# Altium PCB PCB_LiPoBATTERY.PcbDoc
Units mil, origin at the board's own origin, x right, y up, seen from the top; angles counter-clockwise.
Board outline 2000 x 2000 mil, 2 copper layers (Top Layer, Bottom Layer); 22 components, 10 nets, 59 pads, 0 vias.
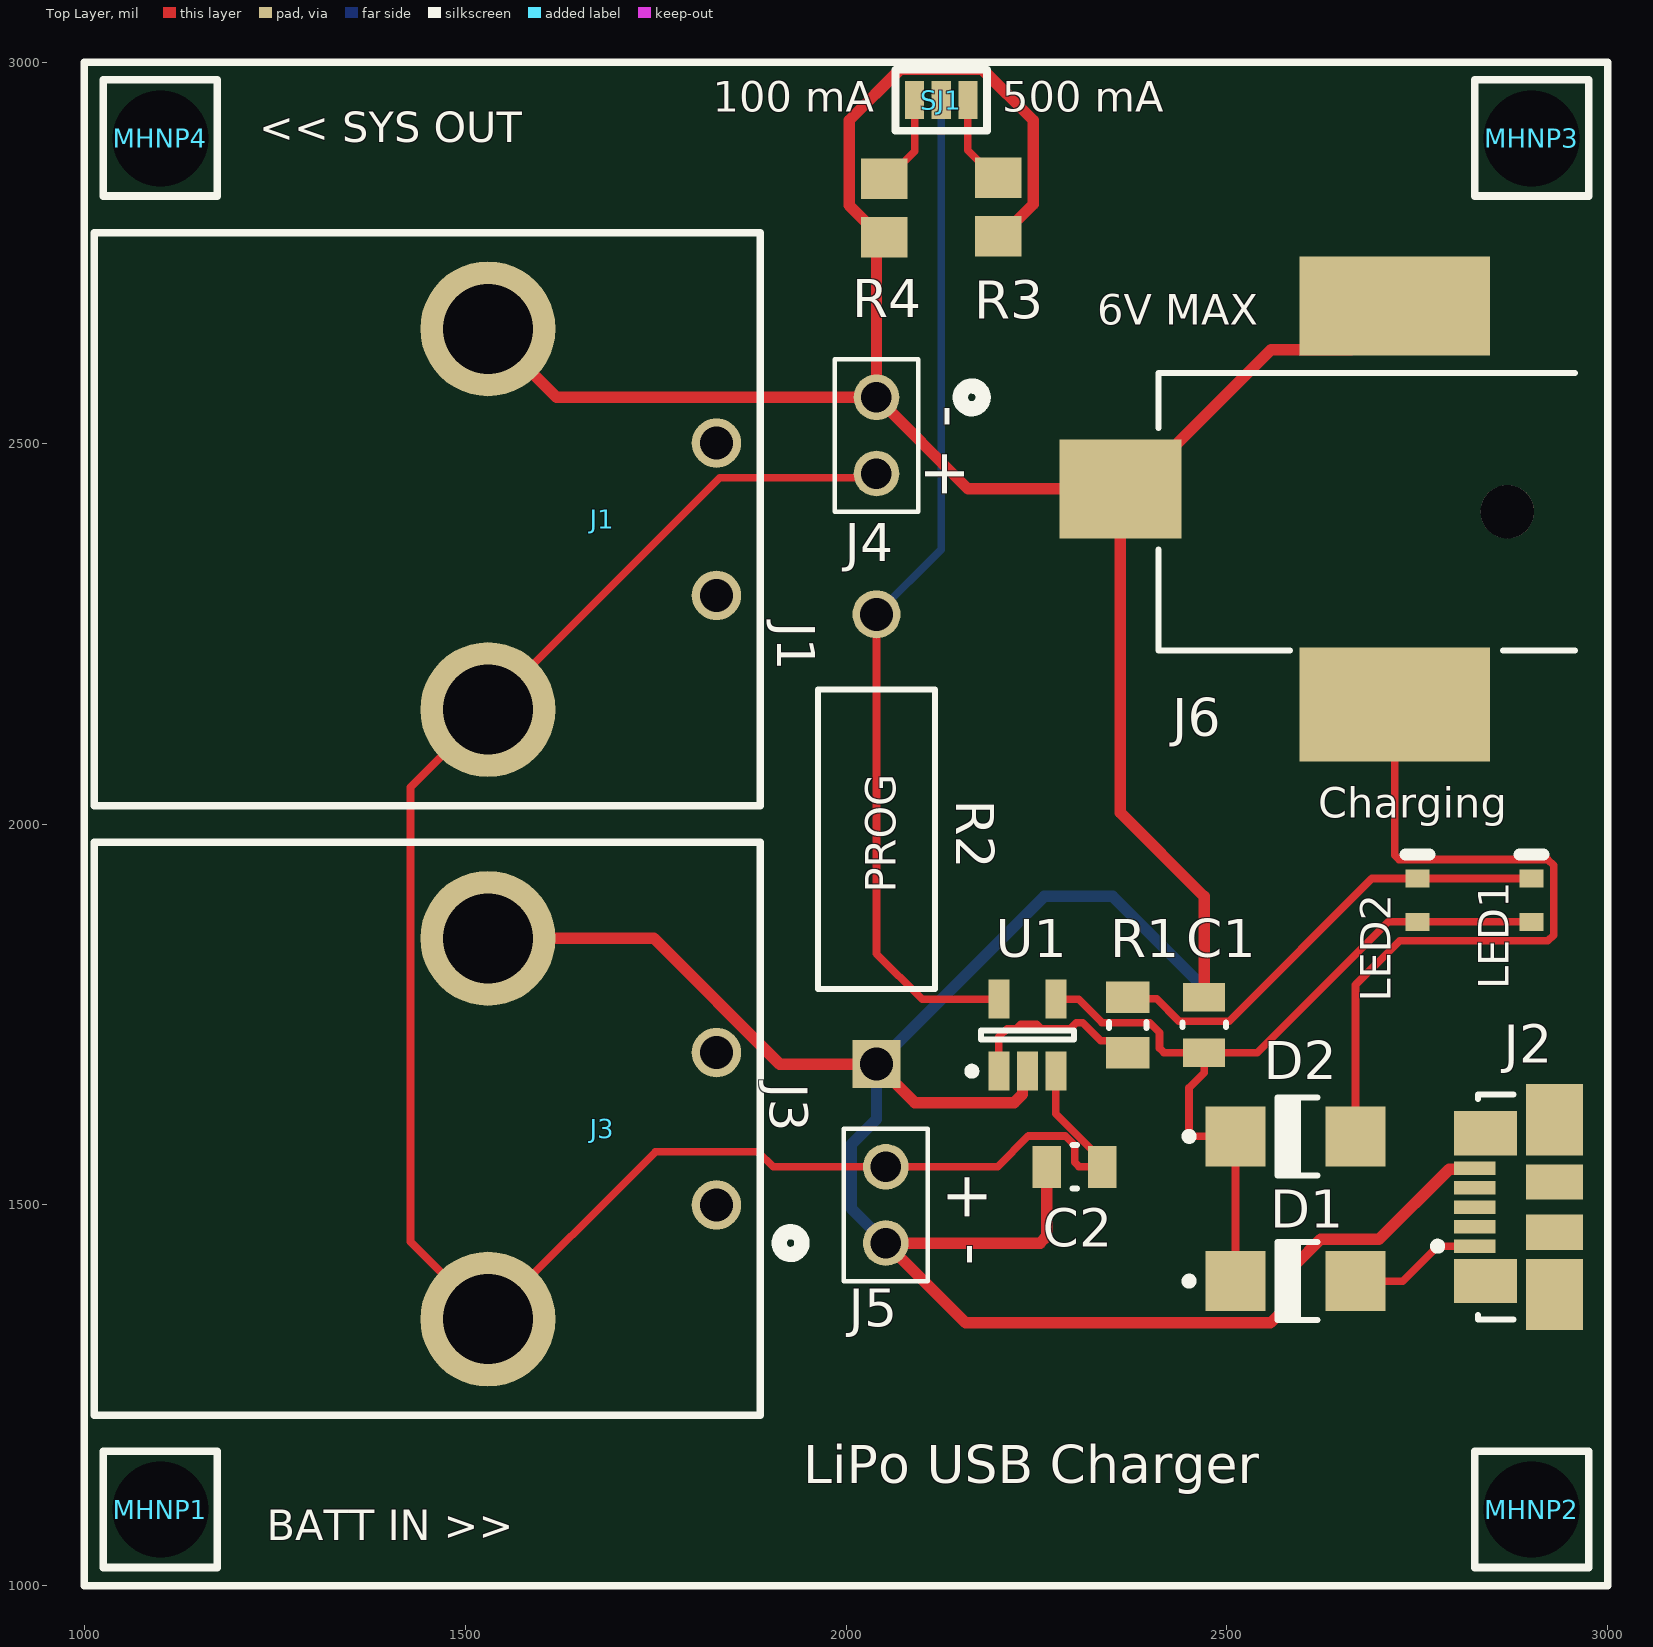
[diagram p0: Top Layer view]
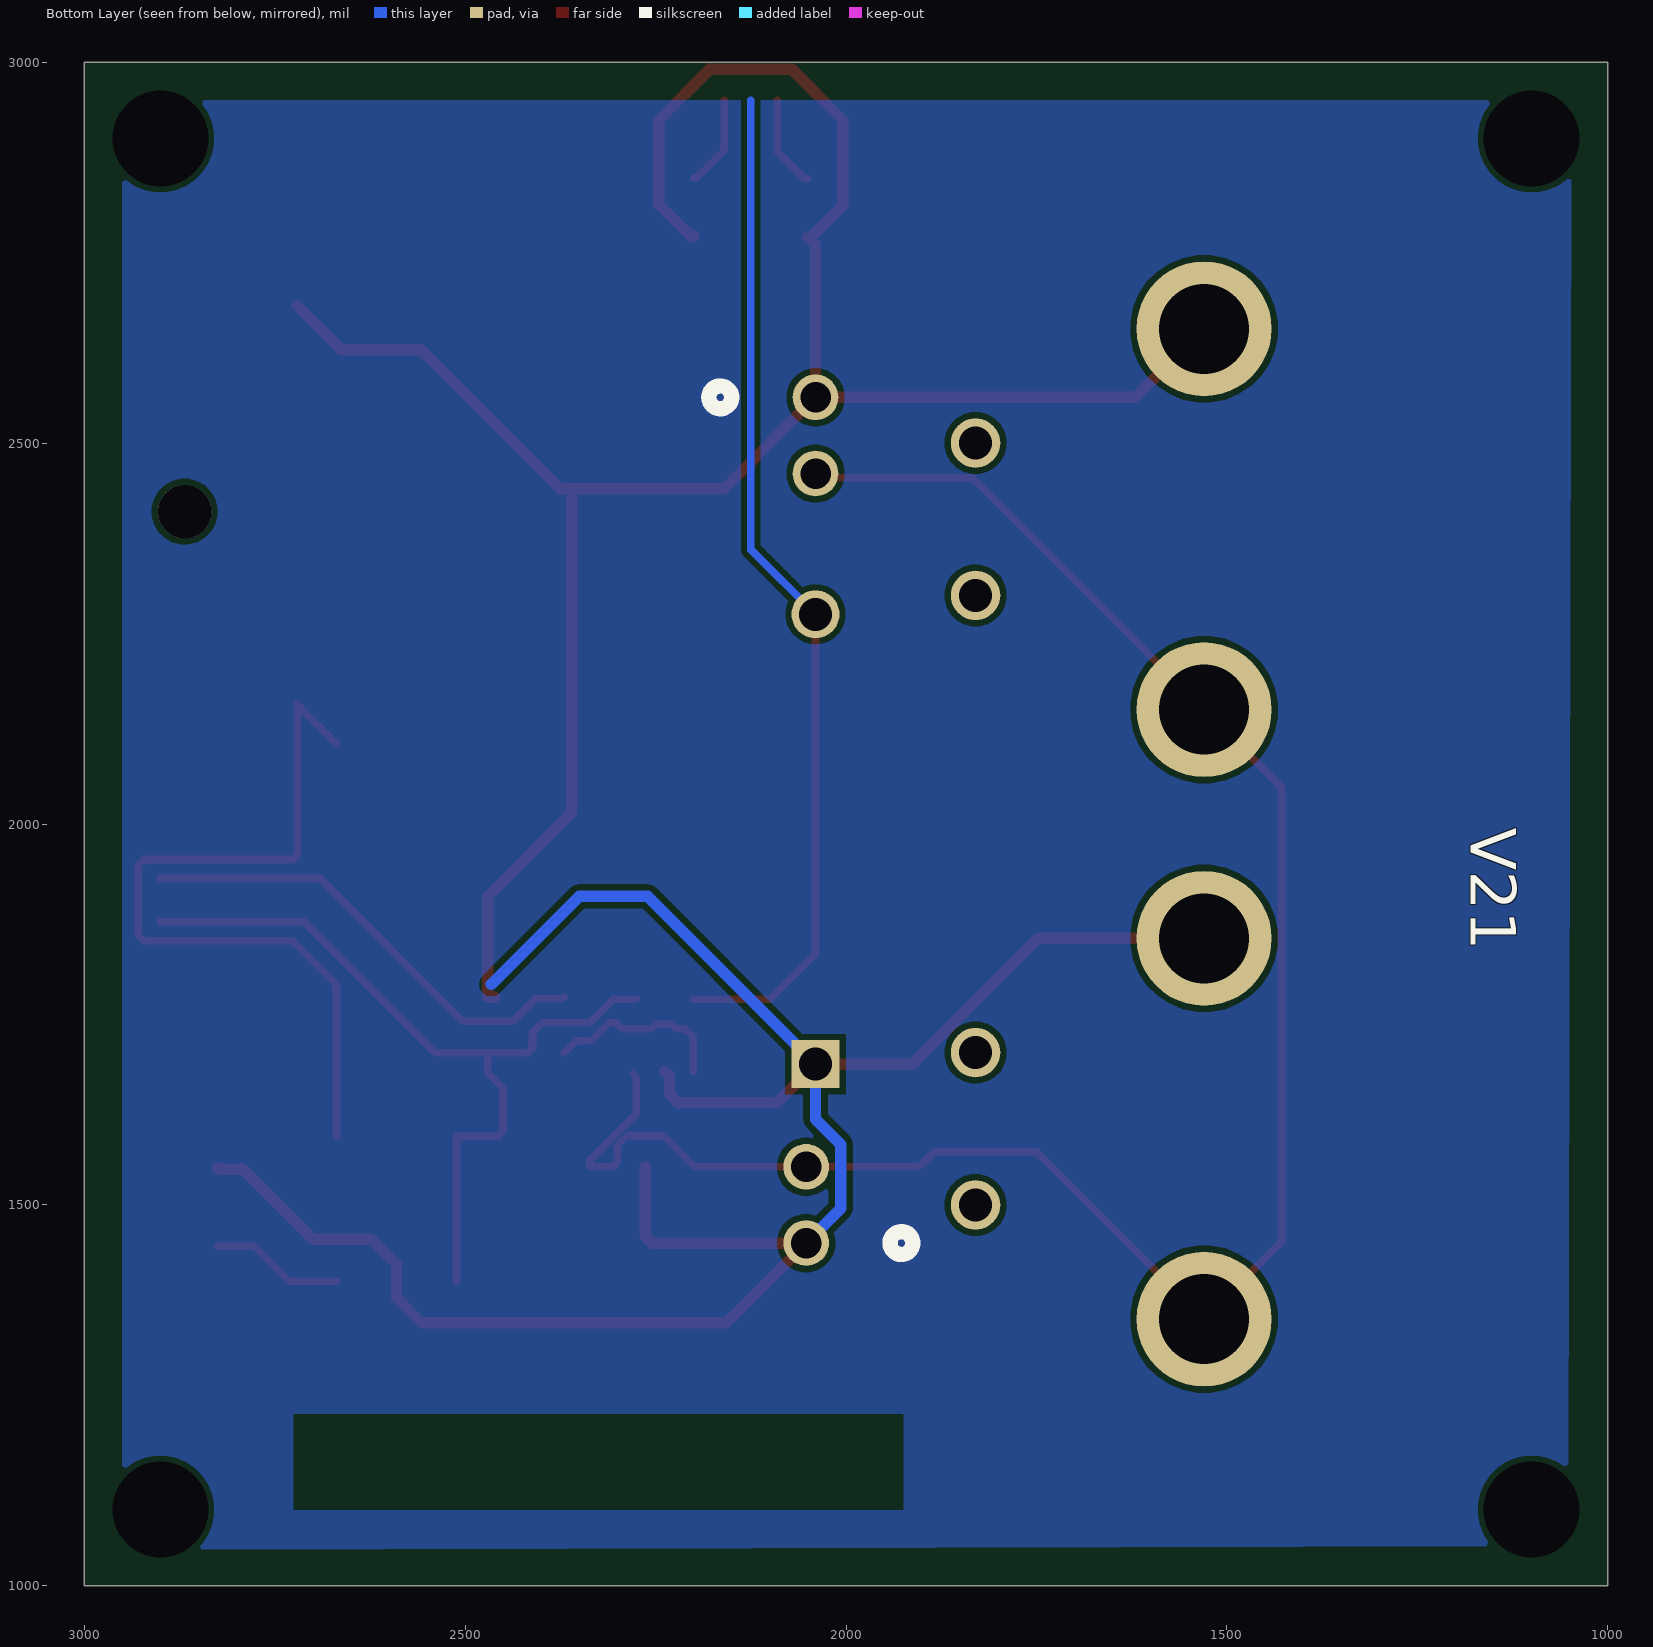
[diagram p1: Bottom Layer view, seen from below]

## Layer stack, top to bottom
Top Solder: solder mask 0.4, Solder Resist, Dk 3.5
Top Layer: signal copper 1.4
Dielectric 1: dielectric 12.6, FR-4, Dk 4.8
Bottom Layer: signal copper 1.4
Bottom Solder: solder mask 0.4, Solder Resist, Dk 3.5

## Board outline
1000,1000 3000,1000 3000,3000 1000,3000

## Design rules (kind name [scope] priority, off if disabled: settings)
Clearance [All] p1: gap=8 ignorepadtopadclearanceinfootprint=TRUE
PolygonConnect [All] p1: connectstyle=Relief reliefconductorwidth=10 reliefentries=4 polygonreliefangle="90 Angle" airgapwidth=10
RoutingVias [All] p1: holewidth=28 width=50 viastyle="Through Hole" minholewidth=28 minwidth=50 maxholewidth=28 maxwidth=50 viatemplateguid#1={125E463E-83C3-42B7-B3A2-AECFA7E12153} viatemplatename#1=v127h71
SolderMaskExpansion [All] p1: expansion=4 istentingtop=FALSE
Width [All] p1: maxlimit=40 minlimit=10 preferedwidth=10
30 further rules are at their usual default settings.

## Components (designator, comment, footprint, x,y, rotation, side; value= is the part's Value field where it differs from the comment)
C1 "4.7uF" FP-CC0805-0_85-MFG 2470,1736.42 r90 top value="4.7 uF"
C2 "4.7uF" FP-CC0805-0_85-MFG 2300,1550 r180 top value="4.7 uF"
D1 "40V, 1A" ONSC-SMA-2-403D-02_V 2590,1400 r0 top
D2 "40V, 1A" ONSC-SMA-2-403D-02_V 2590,1590 r0 top
J1 "CONN HEADER R/A 2POS 5.08MM" 1-179276-2 1530,2650 r270 top locked
J2 "47346-0001" MOLX-47346-0001-5_V 2922.13,1497.03 r90 top
J3 "CONN HEADER R/A 2POS 5.08MM" 1-179276-2 1530,1850 r270 top locked
J4 "2 POS VERT HEADER 0.100\"" 2Pins_AMP 2040,2560 r180 top
J5 "2 POS VERT HEADER 0.100\"" 2Pins_AMP 2052.29,1450 r0 top
J6 "CONN PWR JACK 2.1X5.5MM SOLDER" FP-RASM722PTR13X-MFG 2700.71,2409.92 r90 top locked
LED1 "RED" VISH-TLMS1000_V 2900,1900 r90 top
LED2 "RED" VISH-TLMS1000_V 2750,1900 r90 top
MHNP1 "Mounting Hole Non-Plated 3.2mm" MTHNP3P2MM 1100,1100 r90 top locked
MHNP2 "Mounting Hole Non-Plated 3.2mm" MTHNP3P2MM 2900,1100 r90 top locked
MHNP3 "Mounting Hole Non-Plated 3.2mm" MTHNP3P2MM 2900,2900 r90 top locked
MHNP4 "Mounting Hole Non-Plated 3.2mm" MTHNP3P2MM 1100,2900 r90 top locked
R1 "330" RESC2013X50X30NL20T20 2370,1736.42 r270 top
R2 "PROG" VISH-A1-2_V2 2040,1980 r90 top locked
R3 "2k" RESC2013X70X40ML20T20 2200,2810 r270 top
R4 "10k" RESC2013X70X40ML20T20 2050,2808.39 r90 top
SJ1 "SJUMPER3POS" SJUMPER3POS-Footprint-1 2125,2950 r180 top
U1 "Charge Management Controller" SOT-23-OT5_M 2237.94,1722.76 r90 top

## Footprints (in the part's own frame and the unit in brackets; to place one, negate y for a bottom-side part, rotate by r counter-clockwise, add the part's x,y. Pads: shape width x height; smd on the part's side, far side on the other; paste and mask are expansions set on the pad)
1-179276-2 [mm]
  round 4.5 hole 3: 1(0,0) 2(12.7,0)
  round 1.65 hole 1.1: ""(3.81,7.62) ""(8.89,7.62)
  silkscreen extent -3.2,-13.13 15.9,9.08, body extent -3.02,-13.55 16.06,8.55, height 10.86
2Pins_AMP [mil]
  round 60 hole 40 mask+0: 1(0,0) 2(0,100)
  silkscreen extent -140,-50 55,150, body extent 0,0 10,10, height 10
FP-CC0805-0_85-MFG [mm]
  rect 0.95x1.4 smd paste+0 mask+0: 1(-0.925,0) 2(0.925,0)
  silkscreen extent -0.08,-0.72 0.08,0.72, body extent -1.6,-1.05 1.6,1.05, height 0.25
FP-RASM722PTR13X-MFG [mm]
  rect 3.3x4.06 smd paste+0 mask+0: 1(0.76,8.65)
  rect 3.81x6.35 smd paste+0 mask+0: 2(-6.43,-0.49)
  rect 3.3x6.35 smd paste+0 mask+0: 3(6.86,-0.49)
  round 1.78 hole 1.78 unplated paste-2539.97 mask+0: ""(0,-4.25)
  silkscreen extent -4.63,-6.5 4.63,7.38, body extent -8.43,-7.48 8.61,10.78, height 0.25
MOLX-47346-0001-5_V [mm] "SMD, 5-Leads, Body 7.5x5mm, Pitch 0.65mm"
  rect 0.45x1.38 smd: 1(-1.3,2.46) 2(-0.65,2.46) 3(0,2.46) 4(0.65,2.46) 5(1.3,2.46)
  rect 1.475x2.1 smd: 6(-2.462,2.1) 7(2.462,2.1)
  rect 2.375x1.9 smd: 8(-2.913,-0.2) 11(2.913,-0.2)
  rect 1.175x1.9 smd: 9(-0.837,-0.2) 10(0.837,-0.2)
  silkscreen extent -3.75,1.16 3.75,3.82, body extent -3.99,-2.78 3.99,2.65, height 2.69
MTHNP3P2MM [mm]
  round 1 hole 3.2: ""(0,0)
  silkscreen extent -1.92,-1.9 1.95,1.9
ONSC-SMA-2-403D-02_V [mm]
  rect 2x2 smd: 1(-2,0) 2(2,0)
  silkscreen extent -3.67,-1.3 0.74,1.3, body extent -2.16,-1.3 2.16,1.3, height 2.2
RESC2013X50X30NL20T20 [mm]
  rect 1.05x1.45 smd: 1(-0.925,0) 2(0.925,0)
  silkscreen extent -0.1,-0.63 0.1,0.63, body extent -1.1,-0.72 1.1,0.72, height 0.5
RESC2013X70X40ML20T20 [mm]
  rect 1.35x1.55 smd: 1(-0.975,0) 2(0.975,0)
  body extent -1.1,-0.72 1.1,0.72, height 0.7
SJUMPER3POS-Footprint-1 [mil]
  rect 25x50 smd: 1(-35,0) 2(0,0) 3(35,0)
  silkscreen extent -60,-40 60,40
SOT-23-OT5_M [mm]
  rect 1.3x0.7 smd: 1(-1.2,0.95) 2(-1.2,0) 3(-1.2,-0.95) 4(1.2,-0.95) 5(1.2,0.95)
  silkscreen extent -1.32,-1.55 0.15,1.97, body extent -0.9,-1.55 0.9,1.55, height 1.45
VISH-A1-2_V2 [mm]
  rect 1.6x1.6 hole 1.1: 1(-7.5,0)
  round 1.6 hole 1.1: 2(7.5,0)
  silkscreen extent -5,-1.95 5,1.95, body extent -7.91,-1.95 7.92,1.95, height 3.88
VISH-TLMS1000_V [mm]
  rect 0.6x0.8 smd: 1(-0.725,0) 2(0.725,0)
  silkscreen extent 1.52,-0.4 1.52,0.4, body extent -0.8,-0.4 0.8,0.4, height 0.65

## Part data
C1 C2: library part "CAP CER 4.7UF 6.3V X7R 0805", "4.7µF ±10% 6.3V Ceramic Capacitor X7R 0805 (2012 Metric)", Capacitance="4.7 uF", Manufacturer=Yageo, Manufacturer Part Number=CC0805KKX7R5BB475, Package=CC0805-0.85, Supplier Part Number 1=311-3419-1-ND, Temperature="-30°C to +85°C", Temperature Characteristic=X7R, Temperature Range High=+85°C, Temperature Range Low=-30°C, Tolerance=0.1, Voltage Rating="6.3 V", Automotive=No, Category=Cap, ComponentLink2Description=Datasheet, ComponentLink2URL=http://www.yageo.com/documents/recent/UPY-GPHC_Y5V_6.3V-to-50V_8.pdf, Device Class L1="Passive Components", Device Class L2=Capacitors, Device Class L3="Ceramic Capacitors", Digikey Description="CAP CER 4.7UF 6.3V X7R 0805", Footprint Url=http://www.yageo.com/exep/pages/download/literatures/UPY-C_GEN_24.pdf, Height=0.95mm, Ipc Land Pattern Name=CAPC200125X85, Lead Free=Yes, Material=Ceramic, Mouser Description="Multilayer Ceramic Capacitors MLCC - SMD/SMT 4.7uF 6.3V X7R 10%", Octopart=https://octopart.com/cc0805kkx7r5bb475-yageo-27548069, RoHS=TRUE, Supplier 1=Digi-Key
D1 D2: library part "DIODE SCHOTTKY 40V 1A SMA", "Schottky Power Rectifier, 2-Pin SMA, Pb-Free, Cut Tape, Diode Schottky 40V 1A Surface Mount SMA", Manufacturer="ON Semiconductor", Manufacturer Part Number=MBRA140T3G, Supplier Part Number 1=MBRA140T3GOSCT-ND, ComponentLink1Description="Manufacturer URL", ComponentLink1URL=http://www.onsemi.com/, ComponentLink2Description=Datasheet, ComponentLink2URL=http://www.onsemi.cn/pub_link/Collateral/MBRA140T3-D.PDF, ComponentLink3Description="Package Specification", ComponentLink3URL=http://www.onsemi.com/pub_link/Collateral/403D-02.PDF, Configuration=Single, DatasheetVersion="Rev. 10", IFSM Max (A)=30, Mounting Technology="Surface Mount", PackageDescription="2-Pin Small Molded Package, J-Bend Lead, Body 2.605 x 4.315 mm", PackageReference=SMA-2-403D-02, PackageVersion="Rev. G, 07/2012", Packing="Tape and Reel", PartNumber=MBRA140T3G, RoHS=TRUE, Supplier 1=Digi-Key
J1 J3: "Connector Header Through Hole, Right Angle 2 position 0.200\" (5.08mm)", Manufacturer="TE Connectivity AMP Connectors", Manufacturer Part Number=1-179276-2, Supplier Part Number 1=A29545-ND, ComponentLink1Description="Product URL", ComponentLink1URL=https://www.te.com/usa-en/product-1-179276-2.html?te_bu=Cor&te_type=other&te_campaign=oct_glo_manufacturer&elqCampaignId=26136, Supplier 1=Digi-Key
J2: library part "CONN RCPT USB2.0 MICRO B SMD R/A", "Micro-USB B Receptacle with Flange, -30 to 85 degC, 5-Pin SMD, RoHS, Tape and Reel", Color=Black, Manufacturer=Molex, Maximum Current Rating=1.8/ContactA, Maximum Voltage Rating=30VAC, Operating Temperature=-30to85C, Supplier Part Number 1=WM17141CT-ND, Body Orientation=RightAngle, Contact Material=CopperAlloy, Contact Plating=GoldOverPalladiumNickelOverNickel, Datasheet URL=https://datasheet.ciiva.com/30075/304740473460001-io-nectors-30075527.pdf, Datasheet Version=Dec-13, Dimension=7.8x5.43x2.94mm, Gender=RCP, Housing Material=LiquidCrystalPolymer, Manufacturer Part Number=47346-0001, Manufacturer URL=http://www.molex.com/, Mounting=SurfaceMount, Number of Contacts=5, Number of Ports=1, Number of Terminals=5, Packaging=EmbossedTapeandReel, Pitch=0.65mm, RoHS=Yes, Supplier 1=Digi-Key, Termination Method=Solder, Type=MicroUSBTypeB
J4 J5: library part "CONN HEADER VERT 2POS 0.100\"", "Connector Header Through Hole 2 position", Manufacturer="Amphenol ICC (FCI)", Manufacturer Part Number=67997-402HLF, Supplier Part Number 1=609-5502-ND, Built_By=EMA_UL_Team, Copyright="Copyright (C) 2018 Accelerated Designs. All rights reserved", RefDes=RefDes, SourceLibrary=Amphenol_2013-08-06_Bergstik_2Row_67997, Supplier 1=Digi-Key
J6: "Power Barrel Connector Jack 2.10mm ID (0.083\"), 5.50mm OD (0.217\") Surface Mount, Right Angle", Case/Package=SMD/SMT, Color=Black, Current Rating=5A, Manufacturer=Switchcraft, Manufacturer Part Number=RASM722PTR13X, Package Quantity=120, Supplier Part Number 1=SC2028-1-ND, Connector Type=Jack, Contact Material="Copper Alloy", Contact Plating=Tin, Gender=Male, Housing Color=Black, Housing Material=Thermoplastic, Mount="Surface Mount", Shielding=Unshielded, Supplier 1=Digi-Key, Termination=Solder
LED1 LED2: library part "LED RED 0603 SMD", "Low Current LED, 40 mW, 1.8 V, -40 to 100 degC, 2-Pin SMD (0603), RoHS, Tape and Reel", Forward Current If=2mA, Forward Voltage=1.8V, LED Colour=Red, Manufacturer=Vishay, Manufacturer Part Number=TLMS1000-GS08, Package Description="2-Pin Surface Mount Device, Body 1.6 x 0.8 mm", Package Reference=TLMS1000, Supplier Part Number 1=TLMS1000-GS08CT-ND, Automotive Qualification Standard=AEC-Q100, Bulb Size=1.6mmx0.8mm, Datasheet URL=https://datasheet.ciiva.com/5798/1698881-5798337.pdf, Datasheet Version="Rev. 1.7, 02/2011", LED Mounting=SMD, Lens Shape=Rectangular, Luminous Intensity=4mcd, Manufacturer URL=http://www.vishay.com/, Mounting Technology=SurfaceMount, MSL=MSL2-1year, Packaging=CutTape, Product Range=-, Supplier 1=Digi-Key, SVHC=ToBeAdvised, Viewing Angle=80°, Wavelength Typ=636nm
MHNP1 MHNP2 MHNP3 MHNP4: library part MTHNP3P2MM, "Mounting Hole Non-Plated 3.2 mm drill hole", Manufacturer=N/A, Manufacturer Part Number=N/A
R1: library part "RES SMD 330 OHM 1% 1/8W 0805", "330 Ohms ±1% 0.125W, 1/8W Chip Resistor 0805 (2012 Metric) Automotive AEC-Q200 Thick Film", Manufacturer=Vishay, Manufacturer Part Number=CRCW0805330RFKEA, Supplier Part Number 1=541-330CCT-ND, Supplier 1=Digi-Key
R2: library part "RES 62K OHM 2W 5% AXIAL", "Power Metal Film Leaded Resistor, 62 KOhm +/-5%, 2 W, 2-Pin THD, RoHS, Ammo Pack62 kOhms ±5% 2W Through Hole Resistor Axial Automotive AEC-Q200, Flame Retardant Coating, Safety Metal Film", Manufacturer="Vishay Semiconductor", Manufacturer Part Number=PR02000206202JR500, PartNumber=PR02000206202JA100, Power="2 W", Resistance="62 KOhm", Supplier Part Number 1=PPC62KW-2CT-ND, Temperature Coefficient="+/-250 ppm/degC", Tolerance=+/-5%, ComponentLink1Description="Manufacturer URL", ComponentLink1URL=http://www.vishay.com/, ComponentLink2Description=Datasheet, ComponentLink2URL=http://www.vishay.com/docs/28729/28729.pdf, ComponentLink3Description="Package Specification", ComponentLink3URL=http://www.vishay.com/docs/28729/28729.pdf, DatasheetVersion=Jun-13, Mounting Technology="Through Hole", PackageDescription="2-Pin Axial Lead, Body 10 x 3.9 mm", Packing="Ammo Pack", RoHS=TRUE, Supplier 1=Digi-Key
R3: library part "RES SMD 2K OHM 5% 1/8W 0805", "2 kOhms ±5% 0.125W, 1/8W Chip Resistor 0805 (2012 Metric) Automotive AEC-Q200 Thick Film", Manufacturer=Panasonic, Manufacturer Part Number=ERJ-6GEYJ202V, Supplier Part Number 1=P2.0KACT-ND, Supplier 1=Digi-Key
R4: library part "RES SMD 10K OHM 1% 1/8W 0805", "10 kOhms ±1% 0.125W, 1/8W Chip Resistor 0805 (2012 Metric) Automotive AEC-Q200 Thick Film", Manufacturer=Panasonic, Manufacturer Part Number=ERJ-6ENF1002V, Supplier Part Number 1=P10.0KCCT-ND, Supplier 1=Digi-Key
SJ1: "Solder jumper 3 pads and pins", Manufacturer=N/A, Component Type=Miscellaneous, Manufacturer Part Number=N/A, Pins=3
U1: library part "IC LI-ION/LI-POLY CTRLR SOT23-5", "Simple, Miniature Single-Cell, Fully Integrated Li-Ion/Li-Polymer Charge Management Controller, 4.2V, 5-Pin SOT-23, Industrial Temperature, Cut Tape", Manufacturer=Microchip, Manufacturer Part Number=MCP73811T-420I/OT, Supplier Part Number 1=MCP73811T-420I/OTCT-ND, Code_IPC=SOT23-5, DatasheetVersion="revB, Sep-2007", PackageDescription="5-Lead Plastic Small Outline Transistor (OT) [SOT-23]", PackageReference=SOT-23-OT5, PackageVersion="revBB, Aug-2009", Supplier 1=Digi-Key

## Nets (pads, with @x,y where several pads share a name; then routed paths per layer and width w, separated by ;. In a path a pad name is that pad's centre, name@x,y a point inside that pad or via, vN(x,y) a via of type N, cw(c..) or ccw(c..) an arc to the next point about the centre after c; other vN are vias at no path point)
GND: C1.2 C2.2 J1.1 J2.5 J3.1 J4.1 J5.1 J6.1 J6.3 R2.1 R3.2 R4.1 U1.2 | length 5852.5
  Top Layer w15: J3.1 1747.85,1850 1913.13,1684.72 R2.1 2090.3,1634.42 2220.74,1634.42 2231.66,1645.34 2231.66,1669.23 U1.2 ; J1.1 1620,2560 J4.1 ; R3.2@2201.61,2770 R3.2 2203.94,2771.61 2246.01,2813.69 2246.01,2923.41 2178.92,2990.5 2071.08,2990.5 2003.99,2923.41 2003.99,2812.07 2046.06,2770 R4.1 2040,2760 J4.1 ; C2.2 2263.58,1458.79 2254.8,1450 J5.1 2157.16,1345.13 2557.05,1345.13 2590,1378.08 2590,1421.92 2622.95,1454.87 2699.58,1454.87 2791.69,1546.98 2824.04,1546.98 J2.5 ; C1.2@2461.14,1772.83 C1.2 2470,1905 2360.16,2014.84 J6.1 ; J6.3 2662.54,2622.54 2557.81,2622.54 2375.12,2439.84 J6.1 ; J4.1 2160.16,2439.84 J6.1
  Bottom Layer w15: J5.1 2006.79,1495.5 2006.79,1579.34 2040,1612.54 R2.1 2260.28,1905 2350,1905 2465.57,1789.43
NetC1_1: C1.1 D1.1 D2.1 LED1.1 LED2.1 U1.4 | length 1102.3
  Top Layer w10: U1.4 2305.24,1770 2336.07,1739.17 2398.43,1739.17 2411.54,1726.05 2411.54,1705.86 2417.4,1700 C1.1 ; D1.1 D2.1 2456.09,1590 2450.24,1595.86 2450.24,1653.66 2470,1673.43 C1.1 ; LED1.1 LED2.1 2711.46,1871.46 2540,1700 C1.1
NetC2_1: C2.1 J1.2 J3.2 J4.2 J5.2 U1.3 | length 2623.7
  Top Layer w10: J4.2 2034.52,2454.52 1834.52,2454.52 J1.2 1428.42,2048.42 1428.42,1451.58 J3.2 1750,1570 1884.38,1570 1904.38,1550 J5.2 2198.94,1550 2239.5,1590.56 2287.67,1590.56 2300,1578.23 2300,1555.86 2305.86,1550 C2.1 2336.42,1558.86 2275.34,1619.93 2275.34,1667.96 U1.3@2279.12,1671.73
NetD1_2: D1.2 J2.1 | length 175.5
  Top Layer w10: D1.2 2730.61,1400 2776.46,1445.85 J2.1
NetD2_2: D2.2 J6.2 | length 1061.7
  Top Layer w10: D2.2 2668.74,1788.74 2726.65,1846.65 2921.13,1846.65 2928.75,1854.26 2928.75,1945.74 2921.13,1953.35 2725.86,1953.35 2720,1959.21 J6.2 J6.2@2668.74,2105.51
NetLED1_2: LED1.2 LED2.2 R1.1 | length 620.8
  Top Layer w10: R1.1 2372.33,1770.5 2407.69,1770.5 2437.06,1741.13 2502.94,1741.13 2690.35,1928.54 LED2.2 LED1.2
NetR1_2: R1.2 U1.1 | length 243.4
  Top Layer w10: U1.1 2200.54,1720.54 2211.41,1731.41 2223.51,1731.41 2229.45,1737.35 2250.24,1737.35 2256.18,1731.41 2294.51,1731.41 2302.3,1739.2 2310.58,1739.2 2334.11,1715.67 2354.33,1715.67 R1.2
NetR2_2: R2.2 SJ1.2 U1.5 | length 1340.6
  Top Layer w10: R2.2 2040,1830 2100,1770 U1.5
  Bottom Layer w10: R2.2 2125,2360.28 2125,2950
NetR3_1: R3.1 SJ1.1 | length 120.5
  Top Layer w10: SJ1.1 2160,2884.45 2196.06,2848.39 R3.1
NetR4_2: R4.2 SJ1.3 | length 122.1
  Top Layer w10: R4.2 2053.94,2846.77 2090,2882.83 SJ1.3
pads on no net: J1. J2.2 J2.3 J2.4 J2.6 J2.7 J2.8 J2.9 J2.10 J2.11 J3. J6. MHNP1. MHNP2. MHNP3. MHNP4.

## Polygon pours and split planes (outlines as drawn)
no net on Bottom Layer "NONET_L02_P000" (solid, pour order 0): 2950,2950 2950,1047.41 1052.46,1052.58 1047.54,2950

## Other copper
Multi-Layer:
  pour cut-out: 1925,1225 2725,1225 2725,1100 1925,1100

## Silkscreen, mask and mechanical layers (free items; w line width, h text height)
Top Overlay:
  the board outline again, w10
  text "100 mA" at 1825,2935 h40
  text "500 mA" at 2205,2935 h40
  text "<< SYS OUT" at 1230,2895 h40
  text "6V MAX" at 2330,2655 h40
  text "+ -" at 2155,2425 h60 r90
  text "Charging" at 2620,2008.33 h40
  text "PROG" at 2065,1910 h40 r90
  text "- +" at 2185,1420 h60 r90
  text "LiPo USB Charger" at 1943.58,1135.02 h50
  text "BATT IN >>" at 1240,1060 h40
Bottom Overlay:
  text "V21" at 1180,1995 h60 r90

## Text inside footprints (layer, text, board x,y; h text height)
J2: Mechanical 6 "PCB EDGE" at 2991.3,1213.56 h11.81 r90